# Altium PCB PB10033E1.PcbDoc (part 1 of 2)
Units mm, origin at the board's own origin, x right, y up, seen from the top; angles counter-clockwise.
Board outline 75 x 46 mm, 2 copper layers (Top Layer, Bottom Layer); 199 components, 69 nets, 439 pads, 161 vias.
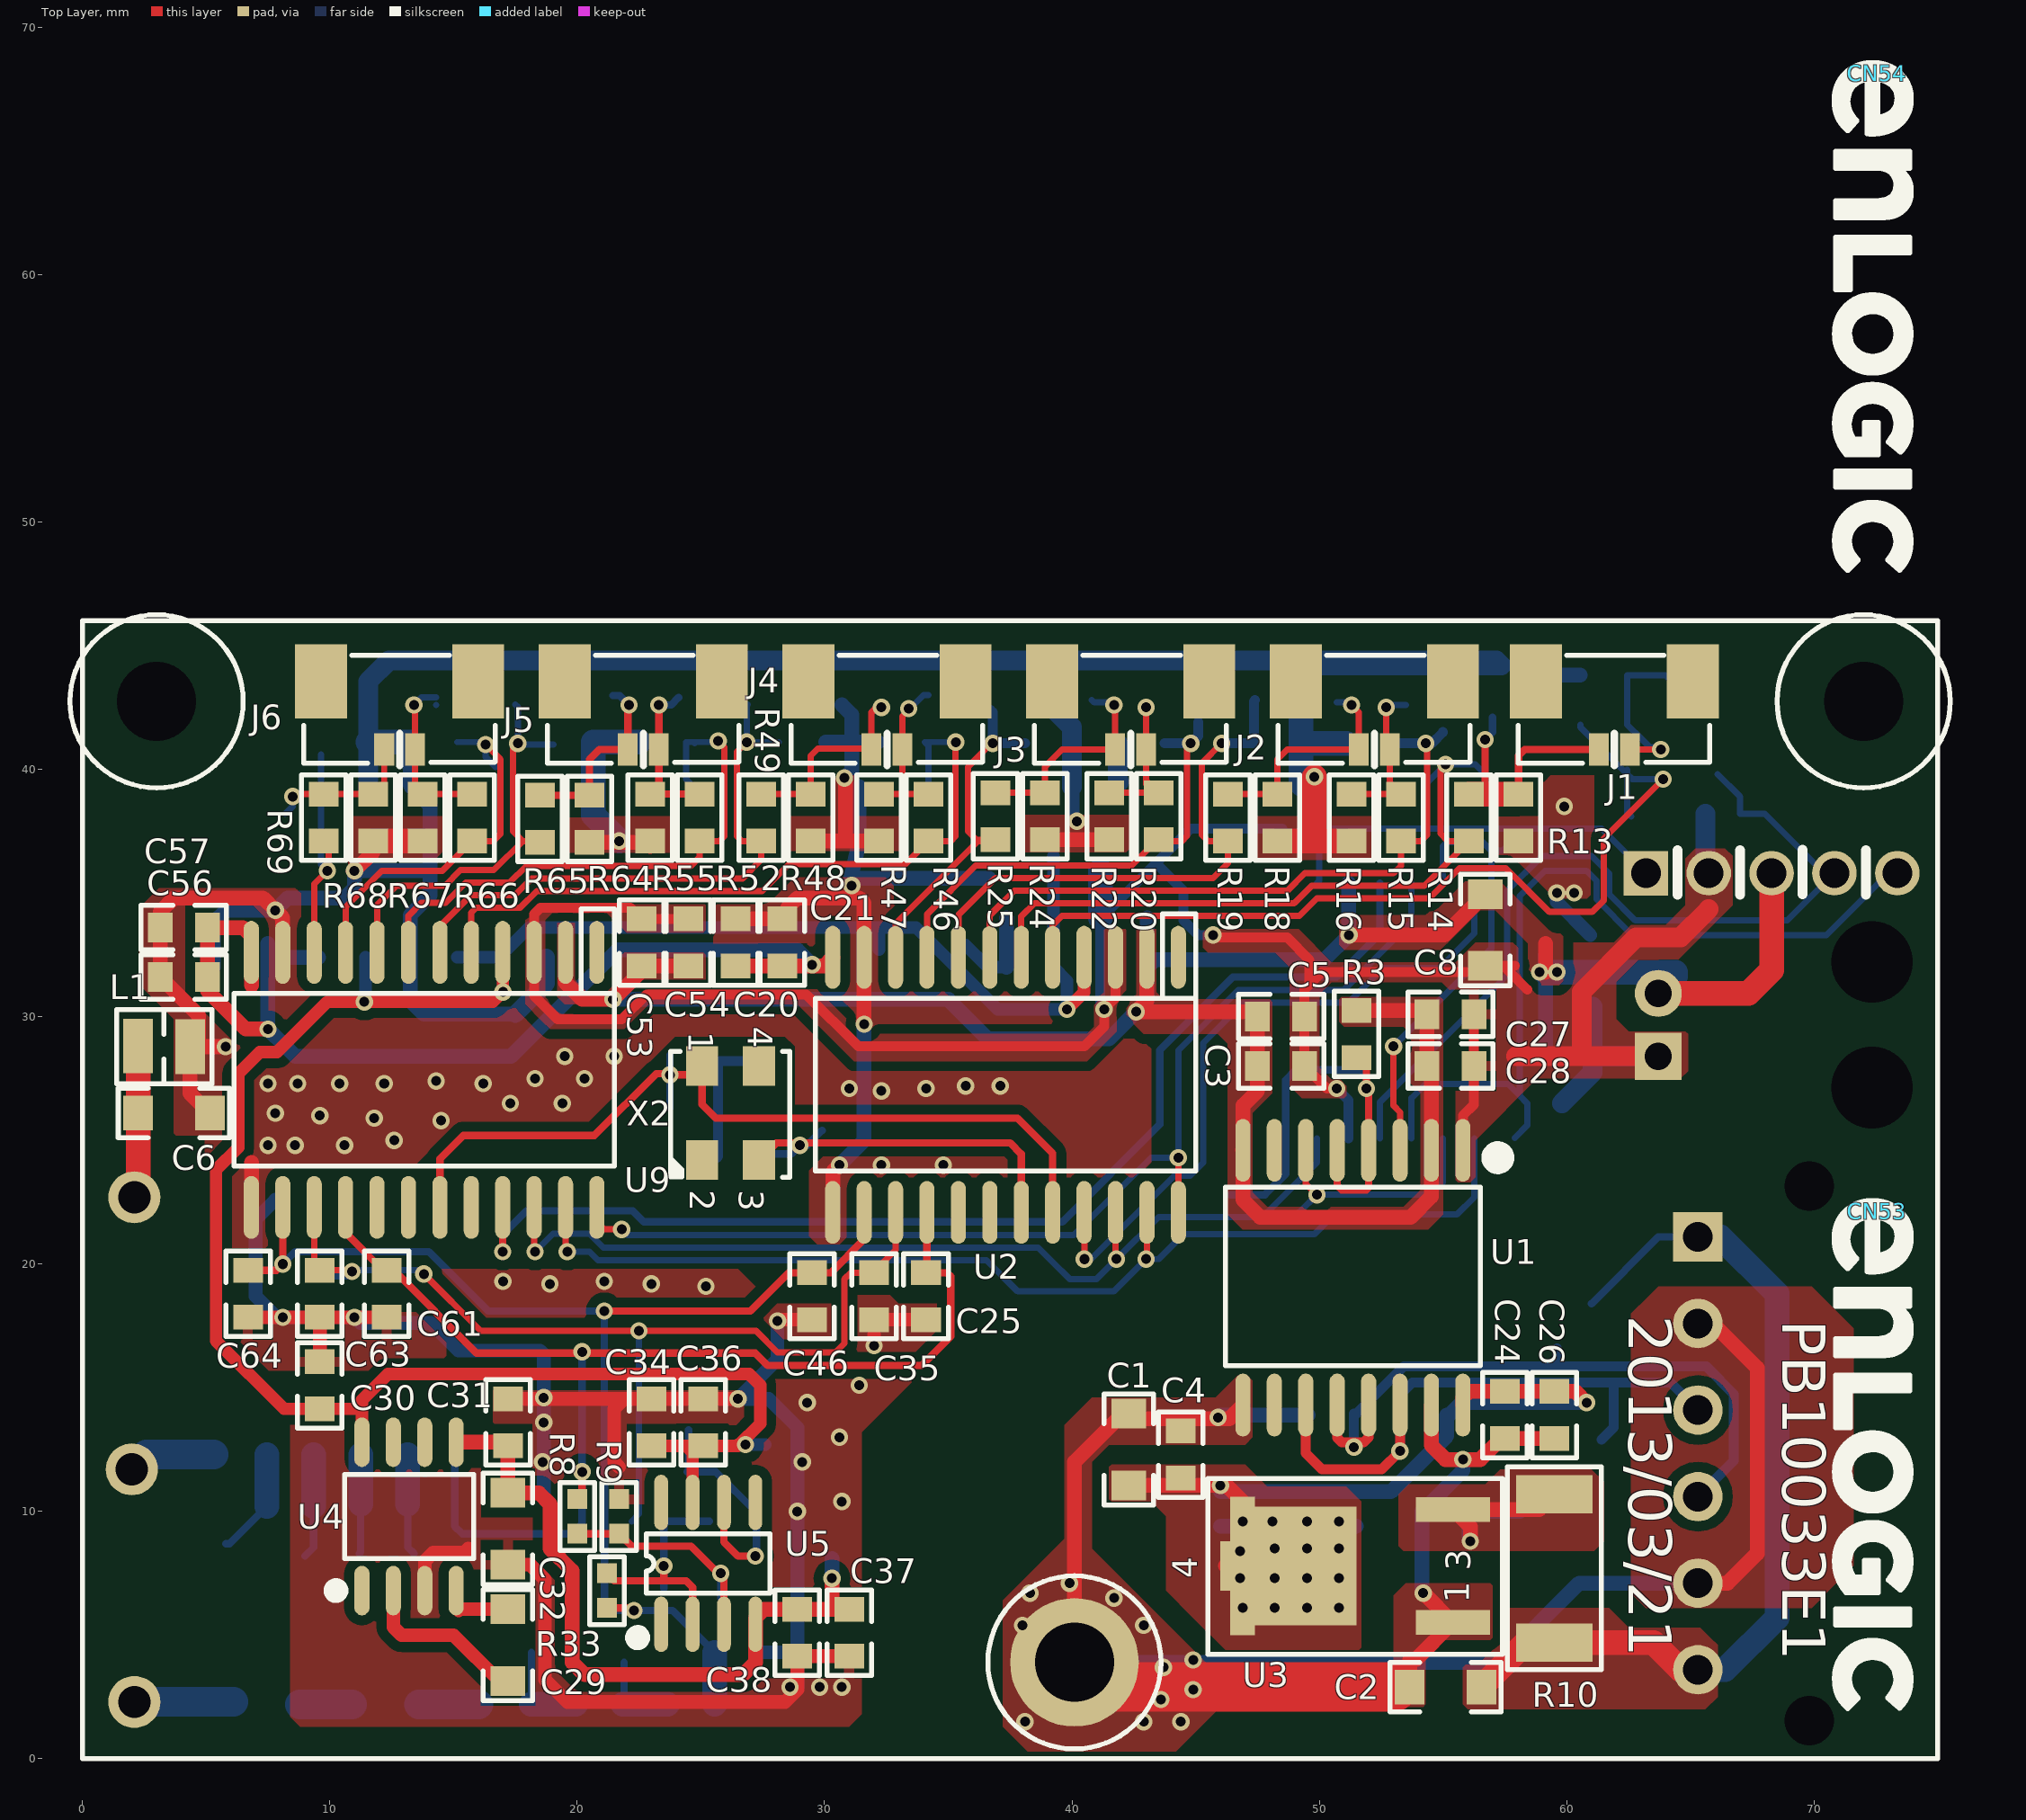
[diagram p0: Top Layer view]
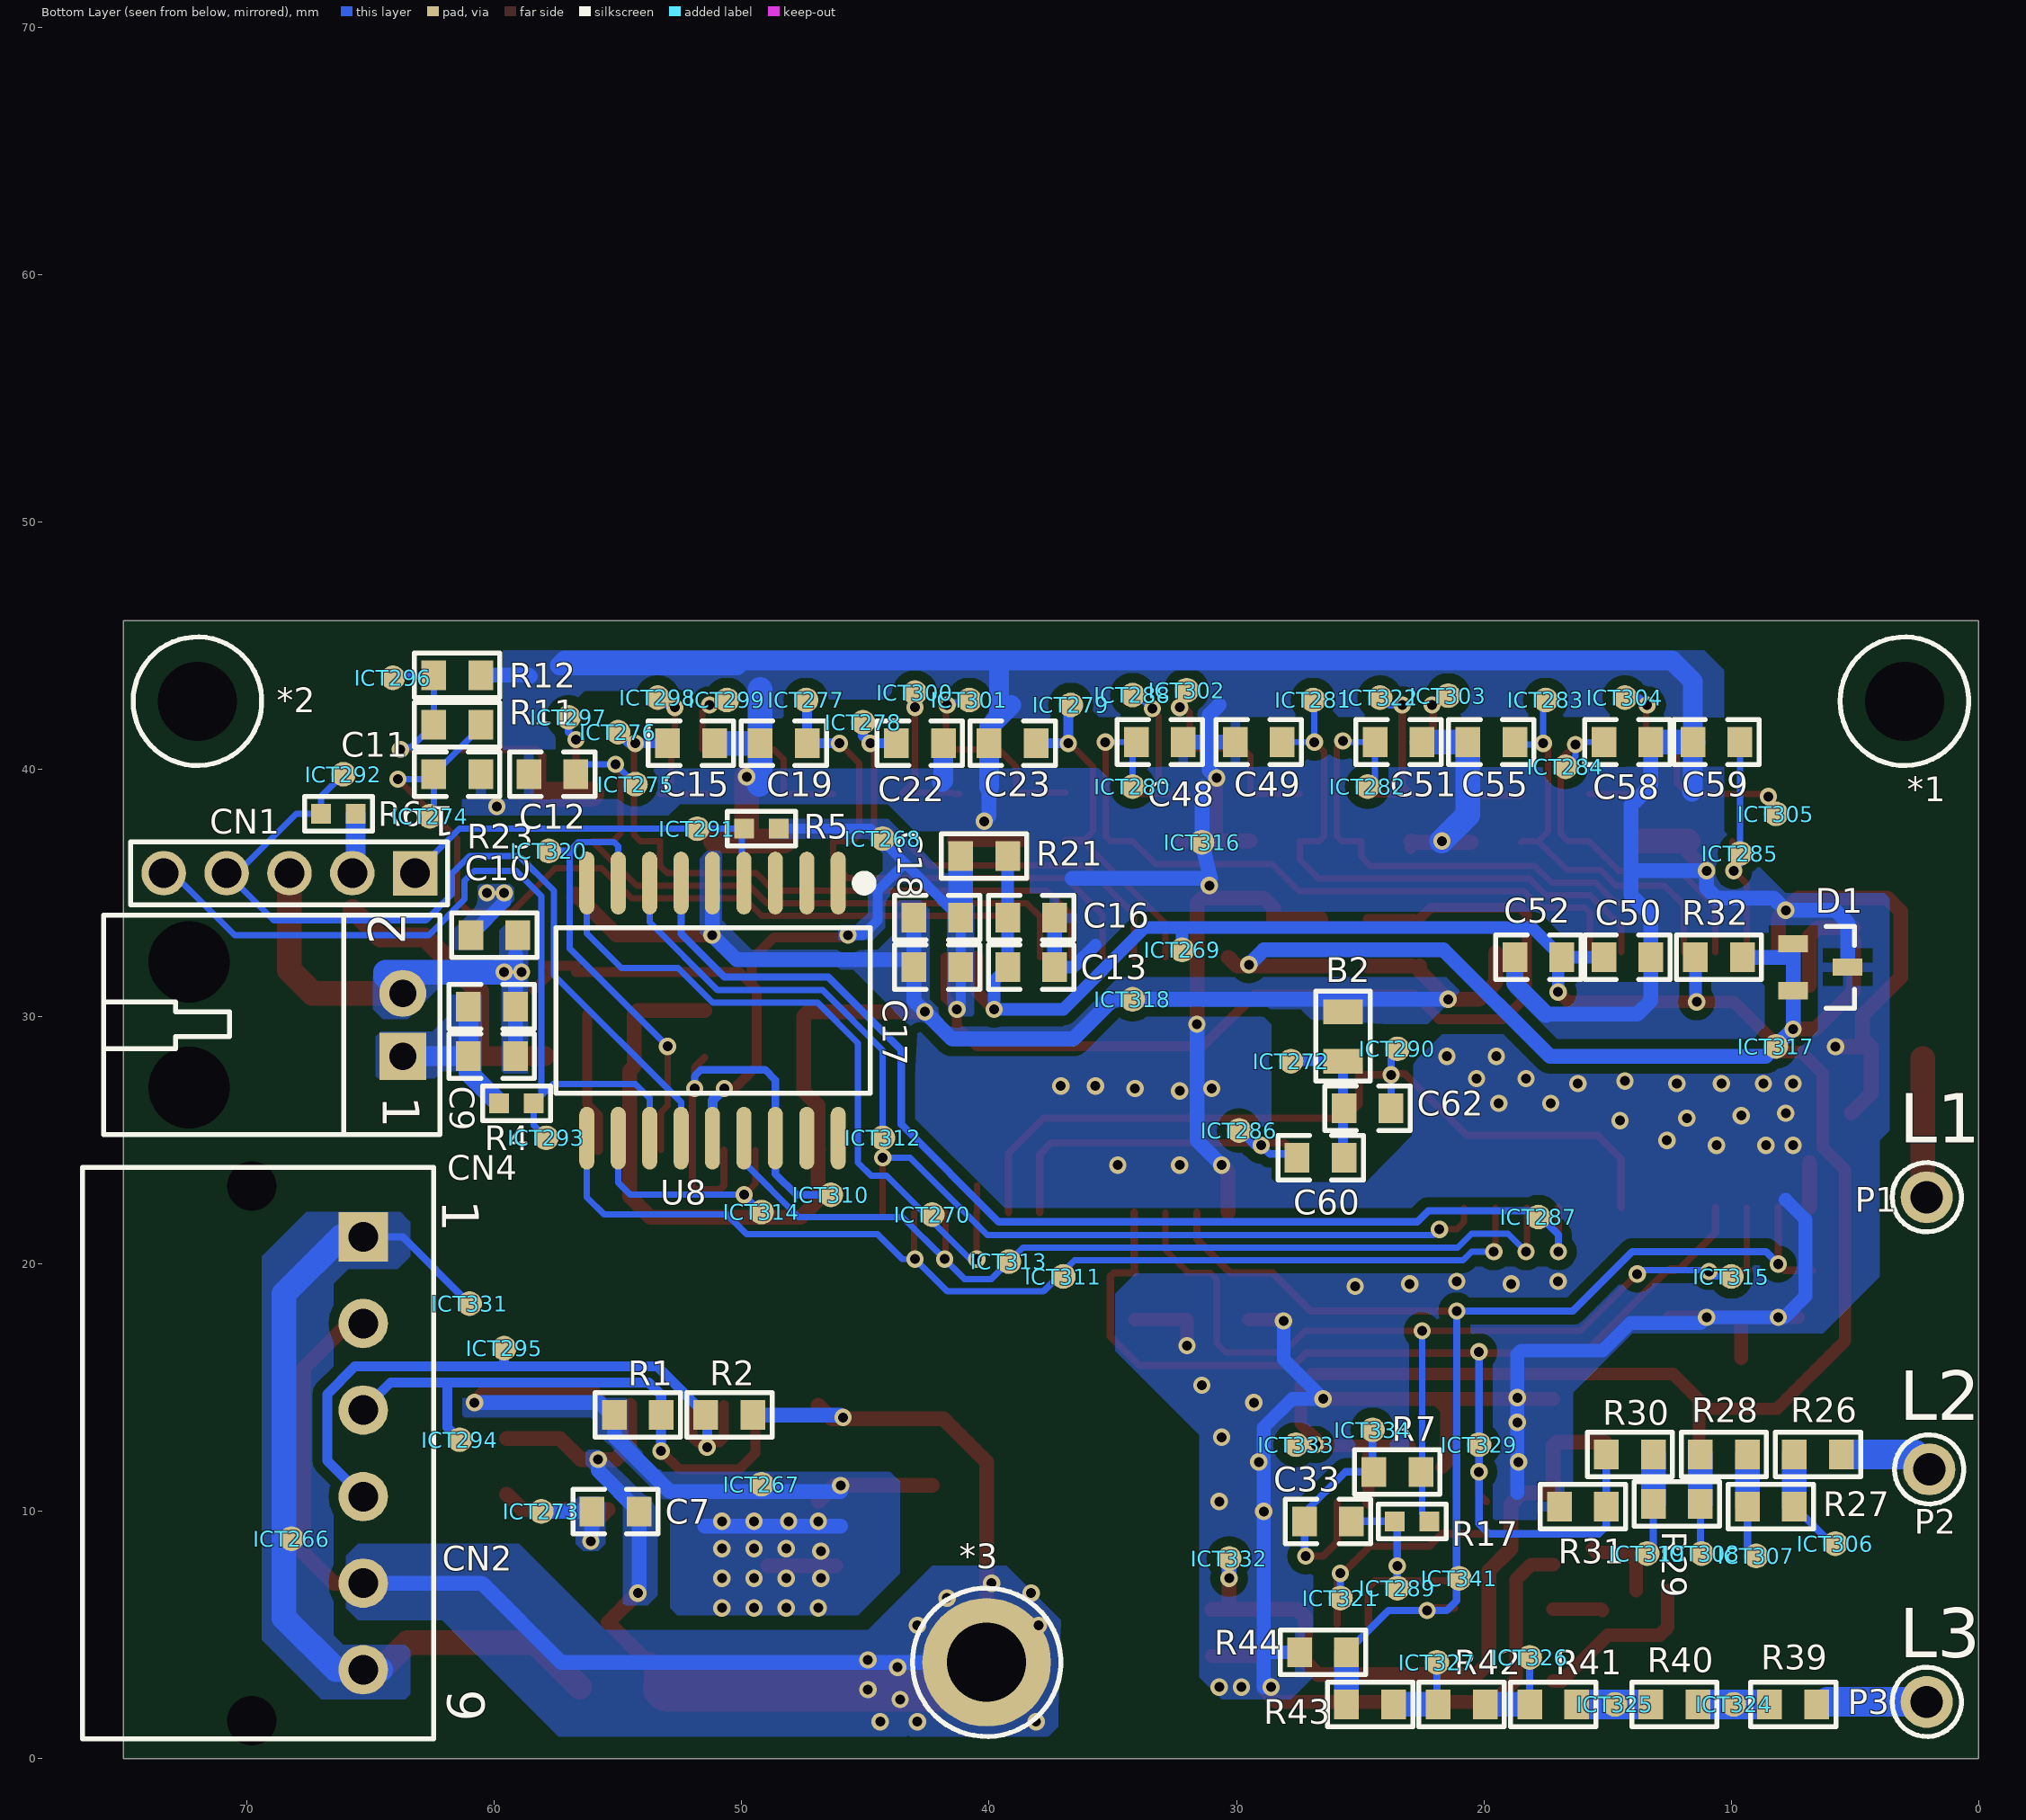
[diagram p1: Bottom Layer view, seen from below]

## Layer stack, top to bottom
Top Layer: signal copper 0.0356
Dielectric: dielectric 0.32, FR-4, Dk 4.8
Bottom Layer: signal copper 0.0356

## Board outline
0,0 0,46 75,46 75,0

## Design rules (kind name [scope] priority, off if disabled: settings)
Clearance Clearance_2 [IsVia OR IsPad vs IsVia OR IsPad] p1: gap=0.4
Clearance Clearance_1 [(InPolygon)] p2: gap=0.4
Clearance [All] p3: gap=0.254
ComponentClearance [All] p1 off: gap=0.254 collisioncheckmode=3 verticalgap=0.254 showdistances=FALSE
FabricationTestPointUsage TestPointUsage [All] p1: valid=0 allowmultiple=FALSE
FabricationTestpoint Testpoint [All] p1: side=3 testpointundercomponent=TRUE minsize=1.016 maxsize=2.54 preferedsize=1.524 minholesize=0 maxholesize=1.016 preferedholesize=0.813 testpointgrid=0.025 allowsidetop=TRUE allowsidebottom=TRUE usegrid=TRUE gridtolerance=0
Height [All] p1 off: minheight=0 maxheight=25.4 prefheight=12.7
HoleSize [All] p1: absolutevalues=TRUE maxlimit=10 minlimit=0.3 maxpercent=80.000 minpercent=20.000
PlaneClearance [All] p1: clearance=0
PlaneConnect [All] p1: planeconnectstyle=Direct reliefexpansion=0.508 reliefentries=4 reliefconductorwidth=0.254 reliefairgap=0.254
PolygonConnect PolygonConnect_4 [InComponent('C32')OR InComponent('R9')OR InComponent('C27')OR InComponent('C28')OR InComponent('C37')OR InComponent('C38')OR InComponent('C30')OR InComponent('C63')OR InComponent('C61')OR InComponent('C64')] p1: connectstyle=Relief reliefconductorwidth=0.4 reliefentries=4 polygonreliefangle="90 Angle"
PolygonConnect PolygonConnect_3 [HasFootprint('ICTP1_0')] p2: connectstyle=Direct reliefconductorwidth=0.254 reliefentries=4 polygonreliefangle="90 Angle"
PolygonConnect PolygonConnect_2 [isVIA] p3: connectstyle=Direct reliefconductorwidth=0.254 reliefentries=4 polygonreliefangle="90 Angle"
PolygonConnect PolygonConnect_1 [OnLayer('Bottom Layer')] p4: connectstyle=Relief reliefconductorwidth=0.4 reliefentries=4 polygonreliefangle="90 Angle"
PolygonConnect [All] p5: connectstyle=Direct reliefconductorwidth=0.4 reliefentries=4 polygonreliefangle="90 Angle"
RoutingVias [All] p1: holewidth=0.6 width=1 viastyle="Through Hole" minholewidth=0.3 minwidth=0.7 maxholewidth=0.6 maxwidth=1
SilkscreenOverComponentPads [All] p1: minsilkscreentomaskgap=0.254
SolderMaskExpansion [All] p1: expansion=0
Width [All] p1: maxlimit=10 minlimit=0.254 preferedwidth=0.3
20 further rules are at their usual default settings.

## Classes and differential pairs
component class SC10033E1: C1 C2 C3 C4 C5 C6 C7 C8 C9 C10 C29 C30 C31 C32 CN1 CN2 CN4 L1 P1 P2 P3 R4 R5 R6 R10 U3 U4 U8
component class U_ISO_RS485: C24 C26 C27 C28 R1 R2 R3 U1
component class U_SC10033E1_3: C48 C49 C50 C51 C52 C53 C54 C55 C56 C57 C58 C59 C61 C63 C64 J4 J5 J6 R46 R47 R48 R49 R52 R55 R64 R65 R66 R67 R68 R69 U9
component class 7758_1: B2 C11 C12 C13 C15 C16 C17 C18 C19 C20 C21 C22 C23 C25 C33 C34 C35 C36 C37 C38 C46 C60 C62 D1 J1 J2 J3 R7 R8 R9 R11 R12 R13 R14 R15 R16 R17 R18 R19 R20 R21 R22 R23 R24 R25 R26 R27 R28 R29 R30 R31 R32 R33 R39 R40 R41 R42 R43 R44 U2 U5 X2

## Components (designator, comment, footprint, x,y, rotation, side; value= is the part's Value field where it differs from the comment)
*1 "Comment" SCREW3_2 3,42.75 r270 bottom
*2 "Comment" SCREW3_2 72,42.75 r270 bottom
*3 "Comment" SCREWFG3_2 40.1,3.9 r270 bottom
B2 "FERRITE" L0805 25.7,29.2 r270 bottom
C1 "CAP" C1206 42.3,12.5 r270 top
C2 "CAP" C1206 55.1,2.9 r0 top
C3 "CAP" C0805 48.45,28 r180 top
C4 "CAP" C0805 44.4,12.3 r90 top
C5 "CAP" C0805 48.45,30 r180 top
C6 "CAP" C1206 3.7,26.1 r180 top
C7 "CAP" C0805 55.1,10 r180 bottom
C8 "CAP" C1206 56.7,33.5 r270 top
C9 "CAP" C0805 60.1,28.4 r180 bottom
C10 "CAP" C0805 60.1,30.4 r0 bottom
C11 "CAP" C0805 61.5,39.8 r0 bottom
C12 "CAP" C0805 57.65,39.8 r180 bottom
C13 "10uF" C0805 38.3,32 r0 bottom
C15 "CAP" C0805 52.05,41.05 r0 bottom
C16 "CAP" C0805 38.3,34 r0 bottom
C17 "10uF" C0805 42.1,32 r0 bottom
C18 "CAP" C0805 42.1,34 r0 bottom
C19 "CAP" C0805 48.3,41.05 r180 bottom
C20 "CAP" C0805 26.4,33 r270 top
C21 "CAP" C0805 28.3,33 r270 top
C22 "CAP" C0805 42.8,41.05 r0 bottom
C23 "CAP" C0805 39.05,41.05 r180 bottom
C24 "CAP" C0805 57.5,13.9 r270 top
C25 "CAP" C0805 34.1,18.7 r90 top
C26 "CAP" C0805 59.5,13.9 r90 top
C27 "CAP" C0805 55.3,30.1 r180 top
C28 "CAP" C0805 55.3,28 r180 top
C29 "CAP" C1206 17.2,4.6 r270 top
C30 "CAP" C0805 9.6,15.1 r270 top
C31 "CAP" C0805 17.2,13.6 r270 top
C32 "CAP" C1206 17.2,9.3 r270 top
C33 "CAP" C0805 26.3,9.6 r180 bottom
C34 "CAP" C0805 23,13.6 r270 top
C35 "CAP" C0805 32,18.7 r90 top
C36 "CAP" C0805 25.1,13.6 r270 top
C37 "CAP" C0805 31,5.1 r90 top
C38 "CAP" C0805 28.9,5.1 r90 top
C46 "CAP" C0805 29.5,18.7 r90 top
C48 "CAP" C0805 33.1,41.1 r0 bottom
C49 "CAP" C0805 29.1,41.1 r180 bottom
C50 "10uF" C0805 14.2,32.4 r0 bottom
C51 "CAP" C0805 23.45,41.1 r0 bottom
C52 "CAP" C0805 17.8,32.4 r180 bottom
C53 "10uF" C0805 22.6,33 r270 top
C54 "CAP" C0805 24.5,33 r270 top
C55 "CAP" C0805 19.7,41.1 r180 bottom
C56 "CAP" C0805 4.1,31.6 r0 top
C57 "CAP" C0805 4.1,33.6 r0 top
C58 "CAP" C0805 14.2,41.1 r0 bottom
C59 "CAP" C0805 10.6,41.1 r180 bottom
C60 "CAP" C0805 26.6,24.3 r180 bottom
C61 "CAP" C0805 12.3,18.8 r90 top
C62 "CAP" C0805 24.7,26.3 r0 bottom
C63 "CAP" C0805 9.6,18.8 r90 top
C64 "CAP" C0805 6.7,18.8 r90 top
CN1 "SIP5" SIP5 63.2,35.8 r0 bottom
CN2 "Header 6" 532590529-6P 65.3,21.1 r270 bottom
CN4 "Header 2" 70551-2P 63.7,28.4 r90 bottom
CN53 "Comment" LOGO 72.542,22.149 r270 top
CN54 "Comment" LOGO 72.542,68.149 r270 top
D1 "Diode-3_2" SOT23-321 6.4,32 r270 bottom
ICT266 "Comment" ICTP1_0 68.2,8.9 r180 bottom
ICT267 "Comment" ICTP1_0 49.2,11.1 r180 bottom
ICT268 "Comment" ICTP1_0 44.3,37.2 r180 bottom
ICT269 "Comment" ICTP1_0 32.2,32.7 r180 bottom
ICT270 "Comment" ICTP1_0 42.3,22 r180 bottom
ICT272 "Comment" ICTP1_0 27.8,28.2 r180 bottom
ICT273 "Comment" ICTP1_0 58.1,10 r180 bottom
ICT274 "Comment" ICTP1_0 62.6,38.1 r180 bottom
ICT275 "Comment" ICTP1_0 54.3,39.4 r180 bottom
ICT276 "Comment" ICTP1_0 55,41.5 r180 bottom
ICT277 "Comment" ICTP1_0 47.4,42.8 r180 bottom
ICT278 "Comment" ICTP1_0 45.1,41.9 r180 bottom
ICT279 "Comment" ICTP1_0 36.7,42.6 r180 bottom
ICT280 "Comment" ICTP1_0 34.2,39.3 r180 bottom
ICT281 "Comment" ICTP1_0 26.9,42.8 r180 bottom
ICT282 "Comment" ICTP1_0 24.7,39.3 r180 bottom
ICT283 "Comment" ICTP1_0 17.5,42.8 r180 bottom
ICT284 "Comment" ICTP1_0 16.7,40.1 r180 bottom
ICT285 "Comment" ICTP1_0 9.65,36.6 r180 bottom
ICT286 "Comment" ICTP1_0 29.9,25.4 r180 bottom
ICT287 "Comment" ICTP1_0 17.8,21.9 r180 bottom
ICT288 "Comment" ICTP1_0 34.2,43 r180 bottom
ICT289 "Comment" ICTP1_0 23.5,6.9 r0 bottom
ICT290 "Comment" ICTP1_0 23.5,28.7 r180 bottom
ICT291 "Comment" ICTP1_0 51.8,37.6 r180 bottom
ICT292 "Comment" ICTP1_0 66.1,39.8 r180 bottom
ICT293 "Comment" ICTP1_0 57.9,25.1 r180 bottom
ICT294 "Comment" ICTP1_0 61.4,12.9 r180 bottom
ICT295 "Comment" ICTP1_0 59.6,16.6 r180 bottom
ICT296 "Comment" ICTP1_0 64.1,43.7 r180 bottom
ICT297 "Comment" ICTP1_0 57,42.1 r180 bottom
ICT298 "Comment" ICTP1_0 53.4,42.9 r180 bottom
ICT299 "Comment" ICTP1_0 50.6,42.8 r180 bottom
ICT300 "Comment" ICTP1_0 43,43.1 r180 bottom
ICT301 "Comment" ICTP1_0 40.8,42.8 r180 bottom
ICT302 "Comment" ICTP1_0 32.018,43.195 r180 bottom
ICT303 "Comment" ICTP1_0 21.445,42.978 r180 bottom
ICT304 "Comment" ICTP1_0 14.3,42.9 r180 bottom
ICT305 "Comment" ICTP1_0 8.2,38.2 r180 bottom
ICT306 "Comment" ICTP1_0 5.8,8.7 r180 bottom
ICT307 "Comment" ICTP1_0 9,8.2 r180 bottom
ICT308 "Comment" ICTP1_0 11.2,8.3 r180 bottom
ICT310 "Comment" ICTP1_0 46.4,22.8 r180 bottom
ICT311 "Comment" ICTP1_0 37,19.5 r180 bottom
ICT312 "Comment" ICTP1_0 44.3,25.1 r180 bottom
ICT313 "Comment" ICTP1_0 39.2,20.1 r180 bottom
ICT314 "Comment" ICTP1_0 49.2,22.1 r180 bottom
ICT315 "Comment" ICTP1_0 10,19.5 r180 bottom
ICT316 "Comment" ICTP1_0 31.4,37.05 r180 bottom
ICT317 "Comment" ICTP1_0 8.2,28.8 r180 bottom
ICT318 "Comment" ICTP1_0 34.2,30.7 r180 bottom
ICT319 "Comment" ICTP1_0 13.4,8.3 r180 bottom
ICT320 "Comment" ICTP1_0 57.8,36.7 r180 bottom
ICT321 "Comment" ICTP1_0 25.8,6.5 r180 bottom
ICT322 "Comment" ICTP1_0 24.2,42.9 r180 bottom
ICT324 "Comment" ICTP1_0 9.9,2.2 r180 bottom
ICT325 "Comment" ICTP1_0 14.7,2.2 r180 bottom
ICT326 "Comment" ICTP1_0 18.15,4.1 r180 bottom
ICT327 "Comment" ICTP1_0 21.9,3.9 r180 bottom
ICT329 "Comment" ICTP1_0 20.2,12.7 r180 bottom
ICT331 "Comment" ICTP1_0 61,18.4 r180 bottom
ICT332 "Comment" ICTP1_0 30.3,8.1 r0 bottom
ICT333 "Comment" ICTP1_0 27.6,12.7 r0 bottom
ICT334 "Comment" ICTP1_0 24.5,13.3 r0 bottom
ICT341 "Comment" ICTP1_0 21,7.3 r180 bottom
J1 "Header 2" 533980271_sd 65.1,43.55 r180 top
J2 "Header 2" 533980271_SD 55.4,43.55 r180 top
J3 "Header 2" 533980271_SD 45.55,43.55 r180 top
J4 "Header 2" 533980271_SD 35.7,43.55 r180 top
J5 "Header 2" 533980271_SD 25.85,43.55 r180 top
J6 "Header 2" 533980271_SD 16,43.55 r180 top
L1 "Inductor" L1008 3.3,28.8 r270 top
P1 "Header 1" PAD1_3 2.1,22.7 r90 bottom (schematic designator CN7)
P2 "Header 1" PAD1_3 2,11.7 r0 bottom (schematic designator CN6)
P3 "Header 1" PAD1_3 2.1,2.3 r0 bottom (schematic designator CN3)
R1 "RES" R0805 54.2,13.9 r180 bottom
R2 "RES" R0805 50.5,13.9 r180 bottom
R3 "RES" R0805 51.5,29.3 r90 top
R4 "RES" R0603 59.1,26.5 r180 bottom
R5 "RES" R0603 49.2,37.6 r0 bottom
R6 "RES" R0603 66.3,38.2 r0 bottom
R7 "RES" R0805 23.5,11.6 r180 bottom
R8 "RES" R0603 20,9.8 r270 top
R9 "RES" R0603 21.7,9.8 r270 top
R10 "RES" R2512 59.5,7.7 r90 top
R11 "RES" R0805 61.5,41.8 r180 bottom
R12 "RES" R0805 61.5,43.8 r180 bottom
R13 "RES" R0805 58.05,38.05 r270 top
R14 "RES" R0805 56.05,38.05 r270 top
R15 "RES" R0805 53.3,38.05 r270 top
R16 "RES" R0805 51.3,38.05 r270 top
R17 "RES" R0603 22.9,9.6 r180 bottom
R18 "RES" R0805 48.3,38.05 r270 top
R19 "RES" R0805 46.3,38.05 r270 top
R20 "RES" R0805 43.5,38.1 r270 top
R21 "RES" R0805 40.2,36.5 r0 bottom
R22 "RES" R0805 41.5,38.1 r270 top
R23 "RES" R0805 60,33.3 r180 bottom
R24 "RES" R0805 38.9,38.1 r270 top
R25 "RES" R0805 36.9,38.1 r270 top
R26 "RES" R0805 6.5,12.3 r0 bottom
R27 "RES" R0805 8.4,10.2 r0 bottom
R28 "RES" R0805 10.3,12.3 r0 bottom
R29 "RES" R0805 12.2,10.3 r0 bottom
R30 "RES" R0805 14.1,12.3 r0 bottom
R31 "RES" R0805 16,10.2 r180 bottom
R32 "RES" R0805 10.5,32.4 r0 bottom
R33 "RES" R0603 21.2,6.8 r90 top
R39 "RES" R0805 7.5,2.2 r0 bottom
R40 "RES" R0805 12.3,2.2 r0 bottom
R41 "RES" R0805 17.2,2.2 r0 bottom
R42 "RES" R0805 20.9,2.2 r0 bottom
R43 "RES" R0805 24.6,2.2 r0 bottom
R44 "RES" R0805 26.5,4.3 r180 bottom
R46 "RES" R0805 34.2,38.05 r270 top
R47 "RES" R0805 32.2,38.05 r270 top
R48 "RES" R0805 29.442,38.05 r270 top
R49 "RES" R0805 27.442,38.05 r270 top
R52 "RES" R0805 24.95,38.05 r270 top
R55 "RES" R0805 22.95,38.05 r270 top
R64 "RES" R0805 20.5,38 r270 top
R65 "RES" R0805 18.5,38 r270 top
R66 "RES" R0805 15.75,38.05 r270 top
R67 "RES" R0805 13.75,38.05 r270 top
R68 "RES" R0805 11.75,38.05 r270 top
R69 "RES" R0805 9.75,38.05 r270 top
U1 "ADM2484E" SOIC16 55.8,24.6 r180 top
U2 "ADE7758" SOIC24-W 44.3,32.4 r180 top
U3 "LD1117-3.3" DPAK-134 50.8,7.8 r90 top
U4 "LMC7660" SOIC8 11.3,6.8 r0 top
U5 "LMV641_D_8" M08A 25.3,7.9 r90 top
U8 "PIC16LF1827" SO18 46.1,35.4 r0 bottom
U9 "ADE7758" SOIC24-W 20.8,32.6 r180 top
X2 "ABM3C" XTAL_5X3_2 26.2,26.1 r270 top

## Footprints (in the part's own frame and the unit in brackets; to place one, negate y for a bottom-side part, rotate by r counter-clockwise, add the part's x,y. Pads: shape width x height; smd on the part's side, far side on the other; paste and mask are expansions set on the pad)
70551-2P [mm] "8.64X13.6X7"
  round 0.2 hole 3.3 unplated: 0(-1.27,8.64) 0(3.81,8.64)
  rect 1.9x1.9 hole 1.1: 1(0,0)
  round 1.9 hole 1.1: 2(2.54,0)
  silkscreen extent -3.17,-1.5 5.71,12.1, body extent -3.17,-1.5 5.71,12.1, height 7
532590529-6P [mm]
  round 0 hole 2 unplated: 0(-2.05,-4.5) 0(19.55,-4.5)
  rect 2x2 hole 1.2: 1(0,0)
  round 2 hole 1.2: 2(3.5,0) 3(7,0) 4(10.5,0) 5(14,0) 6(17.5,0)
  silkscreen extent -2.8,-11.35 20.3,2.85, body extent -2.9,-11.45 20.3,2.95, height 8
533980271_sd [mm]
  rect 2.1x3 smd: 0(0,0) 0(6.35,0)
  rect 0.8x1.3 smd: 1(2.55,2.75) 2(3.8,2.75)
  silkscreen extent -0.69,-1.07 7.06,3.4, body extent -0.69,-1.07 7.06,3.3, height 4.7
533980271_SD [mm]
  rect 2.1x3 smd: 0(0,0) 0(6.35,0)
  rect 0.8x1.3 smd: 1(2.55,2.75) 2(3.8,2.75)
  silkscreen extent -0.69,-1.07 7.06,3.4, body extent -0.69,-1.07 7.06,3.3, height 4.7
C0805 [mm]
  rect 1x1.2 smd: 1(-0.95,0) 2(0.95,0)
  silkscreen extent -1.73,-0.9 1.73,0.9, body extent -1.55,-0.7 1.55,0.7, height 1
C1206 [mm]
  rect 1.2x1.4 smd: 1(-1.45,0) 2(1.45,0)
  silkscreen extent -2.25,-1 2.25,1, body extent -2.3,-0.8 2.3,0.8, height 1
DPAK-134 [mm] "LD1117"
  rect 1x3 smd: 1(-2.285,-4.6) 3(2.285,-4.6)
  rect 0.4x1 smd: 4(-2.6,3.9) 4(2.6,3.9)
  rect 2x0.4 smd: 4(0,4.6)
  rect 4.8x5.1 smd: 4(0,1.85)
  silkscreen extent -3.58,-6.6 3.52,5.3, body extent -3.15,-6.45 3.15,5.15, height 2.4
ICTP1_0 [mm]
  round 1 smd: 1(0,0)
L0805 [mm] "2923451010"
  rect 1x1.6 smd: 1(-1,0) 2(1,0)
  silkscreen extent -1.83,-1.1 1.8,1.1, body extent -1.6,-0.9 1.6,0.9, height 1.6
L1008 [mm] "2.6X2.1X2"
  rect 2.2x1.2 smd: 1(-0.013,-1.05) 2(0.013,1.05)
  silkscreen extent -1.49,-1.91 1.51,1.93, body extent -1.21,-1.75 1.21,1.75, height 2
LOGO [mm]
  silkscreen extent -0.42,-1.74 20.11,1.39
M08A [mil]
  oval 88x22 smd: 1(-97,75) 2(-97,25) 3(-97,-25) 4(-97,-75) 5(97,-75) 6(97,-25) 7(97,25) 8(97,75)
  silkscreen extent -128,-99 47,122, body extent -118,-96 118,96, height 60
PAD1_3 [mm]
  round 2.1 hole 1.3: 1(0,0)
  silkscreen extent -1.4,-1.4 1.4,1.4
R0603 [mm]
  rect 0.8x0.8 smd: 1(-0.7,0) 2(0.7,0)
  silkscreen extent -1.38,-0.7 1.38,0.7
R0805 [mm]
  rect 1x1.2 smd: 1(-0.95,0) 2(0.95,0)
  silkscreen extent -1.73,-0.9 1.73,0.9, body extent -1.55,-0.7 1.55,0.7, height 1
R2512 [mm]
  rect 1.55x3.1 smd: 1(-3,0) 2(3,0)
  silkscreen extent -4.1,-1.9 4.1,1.9, body extent -3.88,-1.65 3.88,1.65, height 1.2
SCREW3_2 [mm]
  round 0 hole 3.2 unplated: 1(0,0)
  silkscreen extent -2.6,-2.6 2.6,2.6
SCREWFG3_2 [mm]
  round 5.2 hole 3.2: 1(0,0)
  silkscreen extent -3,-3 3,3, body extent -3.01,-3.01 3.01,3.01, height 7
SIP5 [mm]
  rect 1.8x1.8 hole 1.2: 1(0,0)
  round 1.8 hole 1.2: 2(2.54,0) 3(5.08,0) 4(7.62,0) 5(10.16,0)
  silkscreen extent -1.32,-1.27 11.5,1.27, body extent -1.42,-1.37 11.6,1.37, height 7
SO18 [mil]
  oval 24x100 smd: 1(0,0) 2(50,0) 3(100,0) 4(150,0) 5(200,0) 6(250,0) 7(300,0) 8(350,0) 9(400,0) 10(400,406) 11(350,406) 12(300,406) 13(250,406) 14(200,406) 15(150,406) 16(100,406) 17(50,406) 18(0,406)
  silkscreen extent -51,-10 449,335, body extent -51,71 449,335, height 102
SOIC8 [mm]
  oval 0.61x2 smd: 1(0,0) 2(1.27,0) 3(2.54,0) 4(3.81,0) 5(3.81,6) 6(2.54,6) 7(1.27,6) 8(0,6)
  silkscreen extent -1.3,-0.25 4.51,4.7, body extent -0.7,1.3 4.51,4.7, height 1.75
SOIC16 [mil]
  oval 24x100 smd: 1(0,0) 2(50,0) 3(100,0) 4(150,0) 5(200,0) 6(250,0) 7(300,0) 8(350,0) 9(350,405.51) 10(300,405.51) 11(250,405.51) 12(200,405.51) 13(150,405.51) 14(100,405.51)
  oval 24.02x100 smd: 15(50,405.51) 16(0,405.51)
  silkscreen extent -68,-1 378,343, body extent -28,59 378,342, height 39
SOIC24-W [mm]
  oval 0.61x2.54 smd: 1(0,0) 2(1.27,0) 3(2.54,0) 4(3.81,0) 5(5.08,0) 6(6.35,0) 7(7.62,0) 8(8.89,0) 9(10.16,0) 10(11.43,0) 11(12.7,0) 12(13.97,0) 13(13.97,10.312) 14(12.7,10.312) 15(11.43,10.312) 16(10.16,10.312) 17(8.89,10.312) 18(7.62,10.312) 19(6.35,10.312) 20(5.08,10.312) 21(3.81,10.312) 22(2.54,10.312) 23(1.27,10.312) 24(0,10.312)
  silkscreen extent -0.7,-1.75 14.67,8.64, body extent -0.7,1.65 14.67,8.64, height 2.5
SOT23-321 [mm]
  rect 0.7x1.2 smd: 1(0,1.1) 2(0.95,-1.1) 3(-0.95,-1.1)
  silkscreen extent -1.65,0.23 1.65,1.38
XTAL_5X3_2 [mm] "ABM3C"
  rect 1.6x1.3 smd: 1(-1.9,-1.15) 2(1.9,-1.15) 3(1.9,1.15) 4(-1.9,1.15)
  silkscreen extent -2.5,-2.42 2.6,2.4, body extent -2.5,-2.42 2.6,2.4, height 2

## Part data
B2: library part EL00002, "Ferrite Bead 600OHM@100MHz 200mA SMD 0805 ROHS"
C1 C2 C8 C29 C32: library part EC00088, "CAP,CMCC,10uF,25V,10%,X7R,1206,SMD,ROHS"
C3 C36 C38: library part EC00018, "CAP SMD CR X7R 50V 10% 10nF 0805 ROHS"
C4 C7 C10 C33 C34 C37: library part EC00078, "CAP SMD CR X7R 50V 10% 0.1uF 0805 ROHS"
C5 C21 C57: library part EC00002, "CAP SMD CR X7R 50V 10% 1uF 0805 ROHS"
C6: library part EC00059, "CAP SMD C0G 50V 5% 68nF 1206 ROHS"
C9: library part EC00055, "CAP SMD CR X7R 50V 10% 1uF 0805 ROHS"
C11 C12 C15 C19 C22 C23 C25 C35 C46 C48 C49 C51 C55 C58 C59 C61 C63 C64: library part EC00079, "CAP SMD X7R 50V 10% 0.033uF 0805 ROHS"
C13 C17 C50 C53: library part EC00034, "CAP SMD CR X5R 16V 10% 10uF 0805 ROHS"
C16 C18 C20 C24 C28 C30 C31 C52 C54 C56: library part EC00014, "CAP SMD CR X7R 50V 10% 0.1uF 0805 ROHS"
C26 C27: library part EC00037, "CAP SMD X7R 50V 10% 10nF 0805 ROHS"
C60 C62: library part EC00017, "CAP SMD C0G 50V 5% 33pF 0805 ROHS"
CN1: library part EJ00017, "CONNECTOR 5PIN,2.54PITCH,SIP-5"
CN2: library part EJ00053, "CONNECTOR 6PIN,3.5PITCH,PTH,ROHS"
CN4: library part EJ00051, "CONNECTOR 2PIN,2.54PITCH,90 Degrees,PTH"
D1: library part EU00043, "IC PROGRAMMABLE PRECISION REFERENCES,2.5-20V,0.5%,SMD,ROHS"
J1 J2 J3 J4 J5 J6: library part EJ00039, "CONNECTOR 1.25mm Pitch Header, Surface Mount, Vertical, Lead-Free, 2 Circuits"
L1: library part EL00009, "INDUCTOR 4.7uH 0.45A 5%,SRF = 50MHz,Q = 26, SMD 1008 ROHS"
P1 P2 P3: library part EJ00022, "CONNECTOR 1PIN,PTH,ROHS"
R1 R2: library part ER00021, "RES THICK_FILM SMD 39K 5% 1/8W ROHS 0805"
R3: library part ER00031, "RES THICK_FILM SMD 10K 5% 1/8W ROHS 0805"
R4 R5 R6: library part ER00213, "RES THICK_FILM SMD 10K ohm 5% 1W ROHS 0603"
R7 R21 R23: library part ER00026, "RES THICK_FILM SMD 0 OHM 5% 1/8W ROHS 0805"
R8 R9 R17 R33: library part ER00211, "RES THIN_FILM SMD 10K 0.1% 1/10W ±25ppm/℃ ROHS 06"
R10: library part ER00212, "RES THICK_FILM SMD 75 ohm 5% 1W ROHS 2512"
R11 R14 R15 R19 R20 R25 R46 R49 R52 R65 R66 R69: library part ER00028, "RES THICK_FILM SMD 1K 1% 1/8W ROHS 0805"
R12 R13 R16 R18 R22 R24 R47 R48 R55 R64 R67 R68: library part ER00201, "RES THIN_FILM SMD 4.99 ohm 0.1% 1/8W ±25ppm/℃ ROHS 08"
R26 R27 R28 R29 R30 R39 R40 R41 R42 R43: library part ER00036, "RES THIN_FILM SMD 200K 0.1% 1/8W 25PPM ROHS 0805"
R31 R44: library part ER00110, "RES THIN_FILM 1K 0.1% 1/8W ±25ppm/℃ ROHS SMD 08"
R32: library part ER00108, "RES THICK_FILM 2.49K 1% 1/8W ROHS SMD 0805"
U1: library part EU00059, "IC Isolated, RS-485/RS-422 transceiver,5kV,SOIC16_W,ROHS"
U2 U9: library part EU00042, "IC Energy Measurement,Irms,VA,VAR,Vrms,Watt,Output:Pulsed&SPI,SOIC_W-24,ROHS"
U3: library part EU00066, "IC REG VOLT +3.3V LDO 800MA DPAK ROHS"
U4: library part EU00046, "IC CMOS Voltage Converters"
U5: library part EU00065, "Op Amp,10MHz,12V,Low Power,SOIC-8,RoHS"
U8: library part EU00033, "IC 8-bit UART SPI I2C,SOIC18-W,SMD,ROHS"
X2: library part EX00008, "XTAL 10MHz 18PF +/-30PPM,3.2mmWx5mmLx1.3mmH,-40~85,RoHS,SMD"

## Via types
v1: diameter 0.7, hole 0.4, Top Layer to Bottom Layer, 161 vias

## Nets (pads, with @x,y where several pads share a name; then routed paths per layer and width w, separated by ;. In a path a pad name is that pad's centre, name@x,y a point inside that pad or via, vN(x,y) a via of type N, cw(c..) or ccw(c..) an arc to the next point about the centre after c; other vN are vias at no path point)
3.3V: C1.2 C4.1 C24.1 C26.2 ICT267.1 R1.1 U1.16 U3.4 | length 38.8
  Top Layer w0.6: C1.2@42.3,11.05 v1(46,11.05) 46.25,11.05 U3.4@46.9,10.4 ; U1.16@55.8,14.3 55.8,14.6 56.05,14.85 C24.1@57.5,14.85 C26.2@59.5,14.85 ; C26.2@59.65,15 C26.2@59.5,14.85 ; v1(60.8,14.4) 60.35,14.85 C26.2@59.5,14.85 ; U3.4@46.2,7.8 U3.4@48.95,7.8 U3.4@46.2,7.8
  Bottom Layer w0.6: 46,9.4 51.5,9.4 ; v1(46,11.05) 46,10.8 52.9,10.8 55.15,13.05 R1.1@55.15,13.8 ; R1.1@55.15,13.9 R1.1@55.15,13.8 ; v1(60.8,14.4) 55.75,14.4 R1.1@55.15,13.8
  other v1: 46.9,6.1 48.2,6.1 49.5,6.1 50.8,6.1 46.8,7.3 48.2,7.3 49.5,7.3 50.8,7.3 46.8,8.4 48.2,8.5 49.5,8.5 50.8,8.5 46.9,9.6 48.1,9.6 49.5,9.6 50.8,9.6
5VF: C3.1 C5.1 C8.2 C9.1 C10.2 C17.1 C18.1 C27.1 C28.1 C53.1 C54.1 CN1.2 CN4.1 ICT268.1 R4.1 R5.1 R6.1 R21.2 U1.1 U2.3 U8.14 U9.3 | length 109.5
  Top Layer w0.4: C53.1@22.6,33.95 22.15,34.4 18.511,34.4 18.26,34.149 U9.3@18.26,32.6 18.26,30.84 19.204,29.896 21.796,29.896 22.8,30.9 29.263,30.9 31.363,28.8 40.5,28.8 41.3,29.6 v1(41.3,30.3) 41.76,30.76 U2.3@41.76,32.4 ; C53.1@22.8,33.95 C54.1@24.7,33.95 ; v1(45.7,33.3) 45.8,33.2 48.7,33.2 49.6,32.3 49.6,31.3 ; v1(50.7,27.1) 50.3,27.1 C3.1@49.4,28 C5.1@49.4,30 49.4,31.1 49.6,31.3 ; U1.1@55.8,24.6 55.8,26 56.25,26.45 C28.1@56.25,28 C27.1@56.25,30.1 ; 57.9,32.05 57.45,32.05 ; 58.4,31.1 57.45,32.05 ; 49.6,31.3 50.1,31.8 56.7,31.8 C8.2@56.7,32.05 57.45,32.05
  Top Layer w0.8: 57.95,28.4 60.6,28.4 ; CN4.1@63.7,28.4 60.6,28.4 ; 65.74,34.34 64.6,33.2 62.8,33.2 60.6,31 60.6,28.4
  Bottom Layer w0.4: R21.2@41.05,36 R21.2@41.15,35.9 ; v1(41.3,30.3) 41.15,30.45 C17.1@41.15,32 C18.1@41.15,34 41.2,34 43.4,36.2 ; v1(45.7,33.3) 45.1,33.3 44.5,33.9 44.5,35.1 43.4,36.2 ; R5.1@48.5,37.6 44.8,37.6 43.4,36.2 ; v1(50.7,27.1) 51.18,26.62 U8.14@51.18,25.088
  Bottom Layer w0.8: R4.1@59.8,26.5 61.05,27.75 C9.1@61.05,28.4 ; C10.2@61.05,30.4 C9.1@61.05,28.4 ; CN4.1@63.7,28.4 C9.1@61.05,28.4 ; R6.1@65.6,38.2 65.6,35.94 CN1.2@65.74,35.8
  Bottom Layer w1: C18.1@41.15,34 R21.2@41.15,35.9
12V: C2.2 CN2.1 CN2.6 ICT266.1 ICT331.1 R10.1 | length 36.7
  Top Layer w1: C2.2@56.55,2.9 58.35,4.7 R10.1@59.5,4.7 63.5,4.7 CN2.6@64.6,3.6
  Bottom Layer w0.3: ICT331.1@61,18.4 63.7,21.1 CN2.1@65.3,21.1
  Bottom Layer w1: CN2.6@64.6,3.6 CN2.6@65.3,3.6 66.4,3.6 68.5,5.7 68.5,18.8 66.2,21.1 CN2.1@65.3,21.1
-5VF: C31.2 C32.1 C37.2 C38.2 ICT332.1 U4.5 U5.4 | length 28.3
  Top Layer w0.6: U4.5@15.11,12.8 17.05,12.8 C31.2@17.2,12.65 C32.1@17.2,10.75 18.45,10.75 18.9,10.3 18.9,8.5 19.796,7.604 19.796,3.904 20.3,3.4 26.705,3.4 27.205,3.9 U5.4@27.205,5.436 27.205,5.705 27.55,6.05 C38.2@28.9,6.05 30.3,6.05 ; v1(30.3,7.3) 30.3,6.05 ; C37.2@31,6.05 30.3,6.05
  Bottom Layer w0.6: v1(30.3,7.3) ICT332.1@30.3,8.1
AGND: C6.1 C11.1 C12.1 C13.1 C15.1 C16.1 C19.1 C20.1 C21.1 C22.1 C23.1 C25.1 C30.1 C31.1 C32.2 C34.1 C35.1 C36.1 C37.1 C38.1 C46.1 C48.1 C49.1 C50.1 C51.1 C52.1 C55.1 C56.1 C57.1 C58.1 C59.1 C61.1 C63.1 C64.1 D1.1 ICT316.1 L1.2 R9.1 R12.2 R13.2 R16.2 R18.2 R22.2 R23.1 R24.2 R31.1 R44.1 R47.2 R48.2 R55.2 R64.2 R67.2 R68.2 U2.11 U2.13 U4.3 U9.11 U9.13 | length 280.3
  Top Layer w0.5: R55.2@22.95,36.843 R55.2@22.95,37.1
  Top Layer w0.55: 7.3,17.85 C63.1@9.6,17.85 ; C30.1@9.6,16.2 C63.1@9.6,17.85 ; C61.1@12.5,17.85 C61.1@12.3,17.85 v1(11,17.85) C63.1@9.6,17.85 ; U4.3@13.84,6.8 13.84,8 14.18,8.34 15.44,8.34 15.6,8.5 ; C32.2@17.2,7.85 18.1,7.85 18.7,7.25 18.7,3.2 19.6,2.3 28.4,2.3 28.9,2.8 C38.1@28.9,4.15 C37.1@31,4.15 ; C31.1@17.2,14.55 21.9,14.55 ; 21.7,11.8 21.5,12 21.5,14.15 21.9,14.55 ; v1(26.5,14.55) C36.1@25.1,14.55 C34.1@23,14.55 21.9,14.55 ; v1(28.1,17.7) 28.15,17.75 C46.1@29.5,17.75 ; v1(32,16.7) C35.1@32,17.75 C25.1@34.1,17.75
  Top Layer w0.6: C6.1@5.15,26.1 4.35,26.9 L1.2@4.35,28.787 ; v1(5.787,28.787) L1.2@4.35,28.787 ; U9.13@6.83,22.288 6.83,24.1 ; U9.11@8.1,32.6 8.1,34 v1(7.8,34.3) 7.3,34.8 3.7,34.8 3.15,34.25 C57.1@3.15,33.6 C56.1@3.15,31.6 4.7,30.05 4.7,29.137 L1.2@4.35,28.787 ; v1(11,35.9) 11.75,36.65 R68.2@11.75,37.1 ; R64.2@20.5,37.05 22.9,37.05 R55.2@22.95,37.1 ; C20.1@26.6,33.95 28.5,33.95 28.5,34.4 28.9,34.8 31.4,34.8 31.6,34.6 U2.11@31.6,32.4 v1(31.6,29.7) ; R48.2@29.442,37.1 R47.2@32.2,37.1 ; U2.13@30.33,22.088 30.33,23.73 v1(30.6,24) ; v1(30.8,39.65) 30.85,39.6 30.85,37.183 ; R24.2@38.7,37.15 R24.2@38.9,37.15 41.35,37.15 R22.2@41.4,37.1
  Top Layer w1: R68.2@11.75,37.1 R67.2@13.75,37.1 ; R18.2@48.3,37.1 49.8,37.1 ; v1(49.8,39.7) 49.8,37.1 ; R16.2@51.05,37.1 49.8,37.1
  Bottom Layer w0.5: 35.7,32.9 36.6,32 C13.1@37.35,32
  Bottom Layer w0.55: 7.8,22.6 7,21.8 7,18.7 7.85,17.85 v1(11,17.85) 11.229,17.621 14.079,17.621 15.2,16.5 18.5,16.5 18.65,16.35 v1(18.65,14.6) 18.65,14.4 v1(18.65,13.6) 18.65,10.75 ; R44.1@27.45,4.3 28.9,4.3 ; v1(28.1,17.7) 28.1,16.15 v1(26.5,14.55) 27.75,14.55 28.9,13.4 28.9,4.3 ; v1@28.9,2.9 28.9,4.3 ; v1(59.6,35) 59.6,34.65 R23.1@60.95,33.3
  Bottom Layer w0.6: D1.1@5.3,32 5.3,33.8 5.8,34.3 v1(7.8,34.3) 8.3,34.8 10.6,34.8 11,35.2 v1(11,35.9) 13.95,35.9 14.05,36 ; v1(5.787,28.787) v1@5.8,28.8 ; C58.1@13.25,41.1 13.25,39.35 14.05,38.55 14.05,36 ; 17.496,30.096 13.804,30.096 13.25,30.65 C50.1@13.25,32.4 13.25,34.1 14.05,34.9 14.05,36 ; C49.1@30.05,41.1 31.1,41.1 ; v1(30.6,24) 31.6,25 v1(31.6,29.7) ; 30.7,42.6 31.1,42.2 31.1,41.1 ; v1(30.8,39.65) 31.1,39.95 31.1,41.1 ; 31.4,39.3 ICT316.1@31.4,37.05 31.05,35.6 36.65,35.6 ; C48.1@32.15,41.1 31.1,41.1 ; C13.1@37.35,32 C16.1@37.35,34 ; 40,39.3 40,38.1 v1(40.2,37.9) ; 58.55,43.75 58.6,43.8 R12.2@60.55,43.8
  Bottom Layer w0.7: 17.496,30.096 18.75,31.35 C52.1@18.75,32.4
  Bottom Layer w0.8: 11.6,39.1 11.55,39.15 C59.1@11.55,41.1 11.55,43.55 12.4,44.4 57.146,44.4 57.346,44.2 50.2,44.2 ; C55.1@20.7,41 C55.1@20.7,41.1 ; C55.1@20.825,40.925 20.9,41 C55.1@20.9,41.1 ; 39.1,42.6 39.6,42.1 ; 39.6,44.3 39.6,42.1 ; 40,39.3 C23.1@40,41.05 40,41.7 ; C22.1@41.85,41.05 41.85,39.55 41.9,39.5 ; 39.6,42.1 40,41.7 ; 39.6,42.1 40,41.7
  Bottom Layer w1: C59.1@11.55,41.1 C58.1@13.25,41.1 ; v1(21.7,37.1) 20.65,38.15 C55.1@20.65,41.1 20.7,41.1 20.9,41.1 C51.1@22.5,41.1 ; 49.25,43.223 C19.1@49.25,41.05 ; 49.3,39.4 49.25,39.45 C19.1@49.25,41.05 ; C15.1@51.1,41.05 C19.1@49.25,41.05
  other v1: 28.6,2.9 29.8,2.9 30.7,2.9 28.9,10 30.7,10.4 18.6,12 29.1,12 30.6,13 29.3,14.4 31.4,15.1 8.1,17.85 25.2,19.1 18.9,19.2 23,19.2 17,19.3 21.1,19.3 32.3,24 34.8,24 7.5,24.8 8.6,24.8 10.6,24.8 12.6,25 14.5,25.8 11.8,25.9 9.6,26 7.8,26.1 17.3,26.5 19.4,26.5 32.3,27 31,27.1 34.1,27.1 35.7,27.2 37.1,27.2 7.5,27.3 8.7,27.3 10.4,27.3 12.2,27.3 16.2,27.3 14.3,27.4 18.3,27.5 20.3,27.5 19.5,28.4 21.5,28.4 60.3,35 31.1,35.3 59.9,38.5
AVDD: C13.2 C16.2 C30.2 C34.2 C36.2 C50.2 C52.2 ICT269.1 ICT333.1 R21.1 R32.2 U2.4 U4.8 U5.7 U9.4 | length 99.6
  Top Layer w0.5: U4.8@11.3,12.8 11.3,14 ; U9.4@16.99,32.6 17,32.59 v1(17,31) 16.6,30.6 v1(11.4,30.6) 9.9,30.6 7.869,28.569 7.169,28.569 6.3,27.7 6.3,24.707 5.4,23.807 5.4,16.9 8.15,14.15 C30.2@9.6,14.15 11.15,14.15 11.3,14 ; C34.2@23,12.65 24.4,12.65 ; U5.7@24.665,10.364 24.665,12.385 24.4,12.65 ; v1@26.5,12.7 v1@26.5,12.65 ; v1(39.8,30.3) 40.49,30.99 U2.4@40.49,32.4 ; 11.3,14 11.3,14.5 12.354,15.554 20.546,15.554 20.554,15.546 20.562,15.554 26.946,15.554 27.4,15.1 27.4,13.55 v1@26.5,12.65 ; 24.4,12.65 C36.2@25.1,12.65 v1@26.5,12.65
  Bottom Layer w0.5: v1(11.4,30.6) 11.45,30.65 R32.2@11.45,32.4 ; C50.2@15.15,32.4 C52.2@16.85,32.4 C52.2@17,32.55 ; v1(17,31) C52.2@17,32.55 ; v1(26.8,12.7) ICT333.1@27.6,12.7 ; ICT269.1@32.2,32.7 32.2,33.5 32.3,33.6 ; R21.1@39.25,36.5 C16.2@39.25,34 C13.2@39.25,32 39.8,31.45 v1(39.8,30.3) 37,30.3 33.7,33.6 32.3,33.6 ; C52.2@17,32.55 18.05,33.6 32.3,33.6
B: C25.2 C61.2 ICT329.1 R8.1 R30.2 R31.2 U2.16 U9.16 | length 51
  Top Layer w0.3: U9.16@10.64,22.288 10.64,21.26 12.1,19.8 12.45,19.8 C61.2@12.5,19.75 ; C61.2@12.3,19.75 C61.2@12.5,19.75 ; R8.1@19.9,10.4 20.2,10.7 v1(20.2,11.6) ; U2.16@34.14,22.088 34.14,19.69 C25.2@34.1,19.65 34.95,19.65 35.104,19.496 35.104,17.083 33.921,15.9 27.7,15.9 27.2,16.4 15.934,16.4 12.584,19.75 C61.2@12.5,19.75
  Bottom Layer w0.3: R31.2@15.05,10.2 R31.2@15.05,10 ; R30.2@15.05,12.3 R31.2@15.05,10 ; v1@20.2,16.3 ICT329.1@20.2,12.7 v1(20.2,11.6) 20.2,9.5 19.8,9.1 15.35,9.1 15.05,9.4 R31.2@15.05,10
  other v1: 20.2,16.453
C: C46.2 C64.2 ICT341.1 R33.1 R43.2 R44.2 U2.14 U9.14 | length 51
  Top Layer w0.3: C64.2@6.7,19.75 7.85,19.75 v1(8.1,20) U9.14@8.1,22.288 ; v1(21.1,18.1) 27,18.1 28.55,19.65 C46.2@29.5,19.65 30.25,19.65 31.6,21 U2.14@31.6,22.088 ; R33.1@21.2,6.1 22.2,6.1 v1(22.3,6)
  Bottom Layer w0.3: v1(8.1,20) 8.6,20.5 14,20.5 16.4,18.1 v1(21.1,18.1) 21.1,13.078 21.104,13.074 21.104,6.4 21.504,6 v1(22.3,6) 22.304,5.996 23.854,5.996 R44.2@25.55,4.3
  Bottom Layer w1: R43.2@25.55,2.2 R44.2@25.55,4.3
CS1: ICT270.1 U2.21 U8.9 | length 29.2
  Top Layer w0.254: U2.21@40.49,23.19 U2.21@40.49,22.088 40.5,22.078 v1(40.5,20.2)
  Bottom Layer w0.254: v1(40.5,20.2) 40.5,20.1 40.666,20.1 44.135,23.569 44.769,23.569 45.3,24.1 45.3,28.931 46.93,30.561 51.179,30.561 52.579,31.961 54.861,31.961 56.26,33.36 U8.9@56.26,35.4
CS2: ICT287.1 U8.6 U9.21 | length 47.4
  Top Layer w0.3: v1(16.99,20.5) U9.21@16.99,22.288
  Bottom Layer w0.3: v1@17,20.3 16.99,20.31 v1(16.99,20.5) 16.99,21.19 17.954,22.154 22.246,22.154 22.692,21.708 39.608,21.708 43.546,25.646 43.546,28.646 46.5,31.6 50.7,31.6 52.45,33.35 U8.6@52.45,35.4
L1_INPUT: C6.2 L1.1 P1.1 | length 6
  Top Layer w1: P1.1@1.65,22.55 P1.1@1.8,22.4 ; P1.1@2.25,22.55 C6.2@2.25,26.1 L1.1@2.25,28.313
L2_INPUT: P2.1 R26.1 | length 3.5
  Bottom Layer w1.2: P2.1@2,11.7 2.6,12.3 R26.1@5.3,12.3
L3_INPUT: P3.1 R39.1 | length 3.8
  Bottom Layer w1.2: P3.1@2.3,2.3 R39.1@6.1,2.3
NetB2_2: B2.2 C60.2 C62.2 ICT272.1 | length 6
  Bottom Layer w0.4: C60.2@25.65,24.3 25.7,24.35 B2.2@25.7,28.2 ICT272.1@27.8,28.2
NetC7_1: C7.1 ICT273.1 R10.2 U3.3 | length 9.2
  Top Layer w0.6: v1(56.1,8.8) 56.1,9.385 U3.3@55.4,10.085 58.885,10.085 R10.2@59.5,10.7
  Bottom Layer w0.6: v1(56.1,8.8) 56.05,8.85 C7.1@56.05,10 ICT273.1@58.1,10
NetC11_2: C11.2 ICT274.1 R11.2 U2.5 | length 37.6
  Top Layer w0.254: U2.5@39.22,32.4 39.22,33.696 39.6,34.076 49.194,34.076 49.902,34.784 54.452,34.784 55.668,36 57.531,36 59.3,34.231 61.031,34.231 61.5,34.7 61.5,37.2 v1(63.9,39.6)
  Bottom Layer w0.254: R11.2@60.55,41.8 60.55,41.7 C11.2@62.45,39.8 ; C11.2@62.45,39.981 C11.2@62.45,39.8 ; ICT274.1@62.6,38.1 62.45,38.25 C11.2@62.45,39.8 ; v1(63.9,39.6) 62.65,39.6 C11.2@62.45,39.8
NetC12_2: C12.2 ICT275.1 R14.2 U2.6 | length 28.1
  Top Layer w0.254: U2.6@37.95,32.4 37.95,34.05 38.484,34.584 48.984,34.584 49.692,35.292 54.242,35.292 R14.2@56.05,37.1 55.2,37.1 54.9,37.4 54.9,40 v1(55.1,40.2)
  Bottom Layer w0.254: ICT275.1@54.3,39.4 v1(55.1,40.2) 56.3,40.2 C12.2@56.7,39.8
NetC15_2: C15.2 ICT276.1 R15.2 U2.7 | length 27.2
  Top Layer w0.254: U2.7@36.68,32.4 36.68,34.103 37.669,35.092 48.71,35.092 49.418,35.8 53,35.8 53.3,36.1 R15.2@53.3,37.1 54.1,37.1 54.354,37.354 54.354,40.996 v1(54.3,41.05)
  Bottom Layer w0.4: C15.2@53,41.05 v1(54.3,41.05) 54.55,41.05 ICT276.1@55,41.5
NetC19_2: C19.2 ICT277.1 R19.2 U2.8 | length 22.6
  Top Layer w0.254: U2.8@35.41,32.4 35.41,34.11 36.9,35.6 45.7,35.6 46.3,36.2 R19.2@46.3,37.1 45.5,37.1 45.246,37.354 45.246,40.246 v1(46.05,41.05)
  Bottom Layer w0.4: v1(46.05,41.05) C19.2@47.35,41.05 47.35,42.75 ICT277.1@47.4,42.8
NetC22_2: C22.2 ICT278.1 R20.2 U2.9 | length 19.4
  Top Layer w0.254: U2.9@34.14,32.4 34.14,34.14 36.108,36.108 42.408,36.108 43.4,37.1 44.445,37.1 44.65,37.305 44.65,40.9 v1(44.8,41.05)
  Bottom Layer w0.4: C22.2@43.75,41.05 v1(44.8,41.05) 45.1,41.35 ICT278.1@45.1,41.9
NetC23_2: C23.2 ICT279.1 R25.2 U2.10 | length 14.4
  Top Layer w0.254: U2.10@32.87,32.4 32.87,33.77 36.2,37.1 R25.2@36.65,37.1 ; v1@36.75,41.05 35.8,40.1 35.8,37.5 36.15,37.15 R25.2@36.9,37.15
  Bottom Layer w0.4: ICT279.1@36.7,42.4 36.8,42.3 v1(36.8,41.05) C23.2@38.1,41.05
NetC29_1: C29.1 U4.4 | length 2
  Top Layer w0.55: U4.4@15.21,6 15.26,6.05 C29.1@17.2,6.05
NetC29_2: C29.2 U4.2 | length 7
  Top Layer w0.55: U4.2@12.57,6.8 12.57,5.33 12.9,5 15,5 16.85,3.15 C29.2@17.2,3.15
NetC33_1: C33.1 ICT334.1 R7.1 U5.6 | length 10.1
  Top Layer w0.3: U5.6@25.935,10.364 25.935,8.765 26.5,8.2 v1(27.2,8.2)
  Bottom Layer w0.3: ICT334.1@24.5,13.3 24.5,11.65 R7.1@24.45,11.6 25.6,11.6 27.25,9.95 C33.1@27.25,9.6 27.25,8.25 v1(27.2,8.2)
NetC33_2: C33.2 ICT289.1 R17.1 R33.2 U5.2 | length 10.1
  Top Layer w0.3: R33.2@21.2,7.5 21.5,7.2 23.5,7.2 ; v1(23.5,7.8) 23.5,7.2 ; U5.2@24.665,5.436 24.665,6.935 24.4,7.2 23.5,7.2
  Bottom Layer w0.3: ICT289.1@23.5,6.9 v1(23.5,7.8) ; v1@23.5,8 23.5,9.5 R17.1@23.6,9.6 C33.2@25.35,9.6
NetC48_2: C48.2 ICT280.1 R46.2 U9.5 | length 29.4
  Top Layer w0.254: U9.5@15.72,32.6 15.72,34.202 15.918,34.4 17.689,34.4 18.371,35.082 27.482,35.082 28.565,36.165 33.265,36.165 R46.2@34.2,37.1 35.1,37.1 35.292,37.292 35.292,41.092 v1(35.3,41.1)
  Bottom Layer w0.254: ICT280.1@34.2,39.3 34.2,40.95 C48.2@34.05,41.1 v1(35.3,41.1)
NetC49_2: C49.2 ICT281.1 R49.2 U9.6 | length 23.8
  Top Layer w0.254: U9.6@14.45,32.6 14.45,33.65 15.708,34.908 17.479,34.908 18.16,35.59 19.208,35.59 19.21,35.592 26.692,35.592 27.442,36.342 R49.2@27.442,37.1 ; v1(26.85,41.1) 26.458,40.708 26.458,37.292 26.65,37.1 R49.2@27.442,37.1 ; R49.2@27.45,37.1 R49.2@27.442,37.1
  Bottom Layer w0.254: ICT281.1@26.9,42.619 26.85,42.569 v1(26.85,41.1) C49.2@28.15,41.1